# EAGLE board BR103_MKL_3357_Lichtplatine_V4 (EAGLE 5.10)
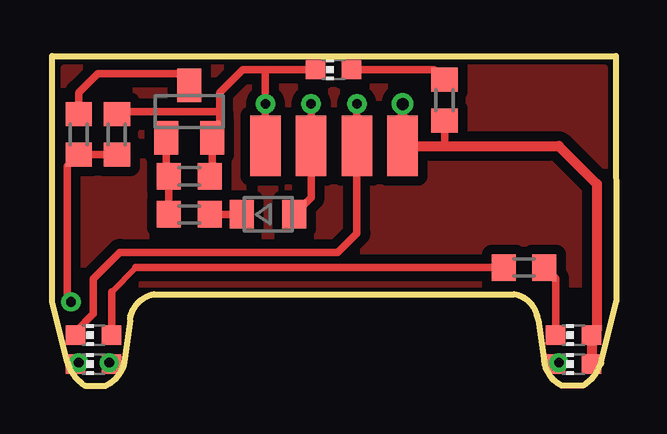
[diagram p0: board, top side]
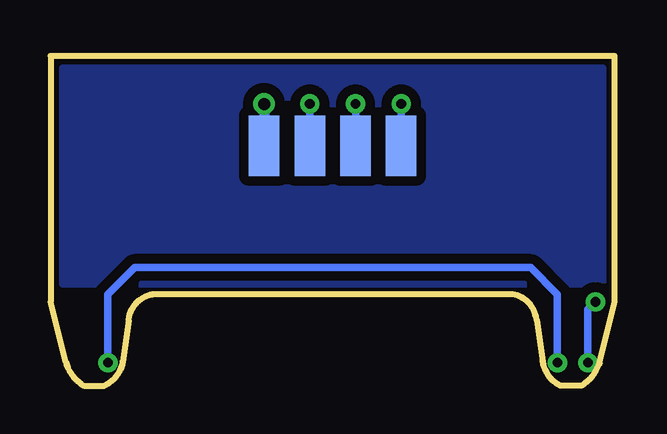
[diagram p1: board, bottom side, seen from below]

No outline drawn. Coordinates in mm, seen from the top.
Copper layers (1*16): Top 0.035mm / dielectric 1.5mm / Bottom 0.035mm
Design rules "default *": minimum track width 7mil, minimum drill 0.6mm, track to track 8mil, track to pad 8mil, pad to pad 8mil, via to via 8mil, smd to smd 8mil, copper to edge 40mil, drill to drill 8mil, minimum pad ring 10mil, minimum via ring 8mil, stop-mask expansion 4mil, vias tented up to drill 0mil, thermal gap 10mil
bKeepout: area 4.1,4 to 19.2,13.8
Milling: 16 lines

## Footprints (pad centres in the part's own frame; a part is rotated, then mirrored left to right if it is on the bottom)
CHIP-LED0603 = smd 0.8 x 0.8: A 0,-0.75; C 0,0.75
SOD323-R2 = smd 1 x 1.2: A 1.1,0; C -1.1,0
SMD1,27-2,54 = smd 1.27 x 2.54: 1 0,0
SOT23 = smd 1 x 1.4: 1 -0.95,-1.1; 2 0.95,-1.1; 3 0,1.1
R0603 = smd 1 x 1.1: 1 -0.85,0; 2 0.85,0

## Placement (x,y rotation side)
AB1  [CHIP-LED0603]  1.73,0.9 90 top
AB2  [CHIP-LED0603]  21.73,0.9 90 top
AB3  [CHIP-LED0603]  11.73,13.19 90 top
D1  BAT 43WS  [SOD323-R2]  9,7.14 0 top
FE  [SMD1,27-2,54]  10.79,10 0 top
FE1  [SMD1,27-2,54]  10.79,10 0 bottom
HI  [SMD1,27-2,54]  12.7,10 0 bottom
HI1  [SMD1,27-2,54]  12.7,10 0 top
PLUS  [SMD1,27-2,54]  14.61,10 0 bottom
PLUS1  [SMD1,27-2,54]  14.61,10 180 top
Q1  BC848BSMD  [SOT23]  5.71,11.43 0 top
R1  3k6  [R0603]  2.7,10.48 90 top
R2  6k8  [R0603]  19.67,4.92 180 top
R3  4k7  [R0603]  16.35,11.91 90 top
R4  1k  [R0603]  1.11,10.48 90 top
R5  2k2  [R0603]  5.71,7.14 0 top
R6  22k  [R0603]  5.71,8.73 0 top
RU1  [CHIP-LED0603]  1.73,2.1 90 top
RU2  [CHIP-LED0603]  21.73,2.1 90 top
VO  [SMD1,27-2,54]  8.89,10 0 bottom
VO1  [SMD1,27-2,54]  8.89,10 0 top

## Library data of the parts
AB1-AB3 RU1 RU2 = led
D1 = diode
FE FE1 HI HI1 PLUS PLUS1 VO VO1 = wirepad
Q1 = transistor-npn
R1-R6 = rcl

## Nets
N$1: AB3.A R3.2
N$2: AB1.A AB2.C
N$3: AB1.C R1.1 R4.1
N$4: Q1.3 R4.2
N$5: D1.A FE1.1 FE.1
N$6: R2.2 RU1.A
N$7: R2.1 RU2.C
N$8: Q1.1 R5.1 R6.1
N$10: AB2.A PLUS1.1 PLUS.1 R3.1 RU2.A
N$11: AB3.C Q1.2 R1.2 R6.2 VO1.1 VO.1
N$12: D1.C R5.2
N$13: HI1.1 HI.1 RU1.C

## Tracks (layer width: path | path; a pad name or v marks a point on that pad's centre or on a via)
N$1
  Top 0.305: AB3.A 15.92,13.19 R3.2
N$2  (via drill 0.4)
  Top 0.305: AB1.A v2.38,0.95 | AB2.C 21.07,1 v21.11,0.95
  Bottom 0.305: v21.11,0.95 21.11,3.81 20,4.92 3.49,4.92 2.38,3.81 v2.38,0.95
N$3  (via drill 0.4)
  Top 0.254: AB1.C 0.95,0.95 | v0.79,3.49 0.64,3.65
  Top 0.305: R1.1 R4.1 0.64,9.15 0.64,3.65 | 0.95,0.95 v1.11,0.95
  Bottom 0.305: v1.11,0.95 1.11,3.17 v0.79,3.49
N$4
  Top 0.305: R4.2 1.11,12.22 1.91,13.02 5.23,13.02 Q1.3
N$5  (via drill 0.4)
  Top 0.305: v10.79,11.75 FE1.1 10.79,7.84 D1.A
  Bottom 0.305: v10.79,11.75 FE1.1
N$6
  Top 0.254: 2.48,3.9 3.49,4.92
  Top 0.305: 3.49,4.92 R2.2 | RU1.A 2.48,3.9
N$7
  Top 0.305: RU2.C 20.98,4.46 R2.1
N$8
  Top 0.305: Q1.1 4.76,8.83 R6.1 R5.1
N$9
  pour Bottom (isolate 0.406): 0.5,13.25 23,13.25 23,4.25 0.5,4.25
  pour Top (isolate 0.406): 0.5,13.25 23,13.25 23,4.25 0.5,4.25
N$10  (via drill 0.5)
  Top 0.305: 16.35,10 R3.1
  Top 0.406: v14.61,11.75 PLUS1.1 16.35,10 21.11,10 22.7,8.41 22.7,2.33 RU2.A AB2.A
  Bottom 0.406: v14.61,11.75 PLUS1.1
N$11  (via drill 0.4)
  Top 0.305: VO1.1 v8.89,11.75 8.89,13.18 | AB3.C 10.98,13.18 8.89,13.18 | R1.2 2.78,11.43 6.99,11.43 | 8.89,13.18 7.94,13.18 6.99,12.22 6.99,11.43 | 6.99,11.43 6.99,10.65 Q1.2 6.67,8.83 R6.2
  Bottom 0.305: v8.89,11.75 VO1.1
N$12
  Top 0.305: R5.2 D1.C
N$13  (via drill 0.4)
  Top 0.254: RU1.C 0.98,2.25
  Top 0.305: v12.7,11.75 HI1.1 12.7,6.35 11.91,5.56 2.82,5.56 1.71,4.45 1.71,2.98 0.98,2.25
  Bottom 0.305: v12.7,11.75 HI1.1

## Text on the board
tStop: BR103 LED
bStop: BR103 LED | Für Märklin 3357 | vo | Fl | hi | + | design by Janik Merz